# Altium PCB ARDUBOY.PcbDoc
Units mil, origin at the board's own origin, x right, y up, seen from the top; angles counter-clockwise.
Board outline 1980.03 x 1980.03 mil, 2 copper layers (Top Layer, Bottom Layer); 21 components, 26 nets, 143 pads, 47 vias.
Unrouted connection lines stored in the file: 18.
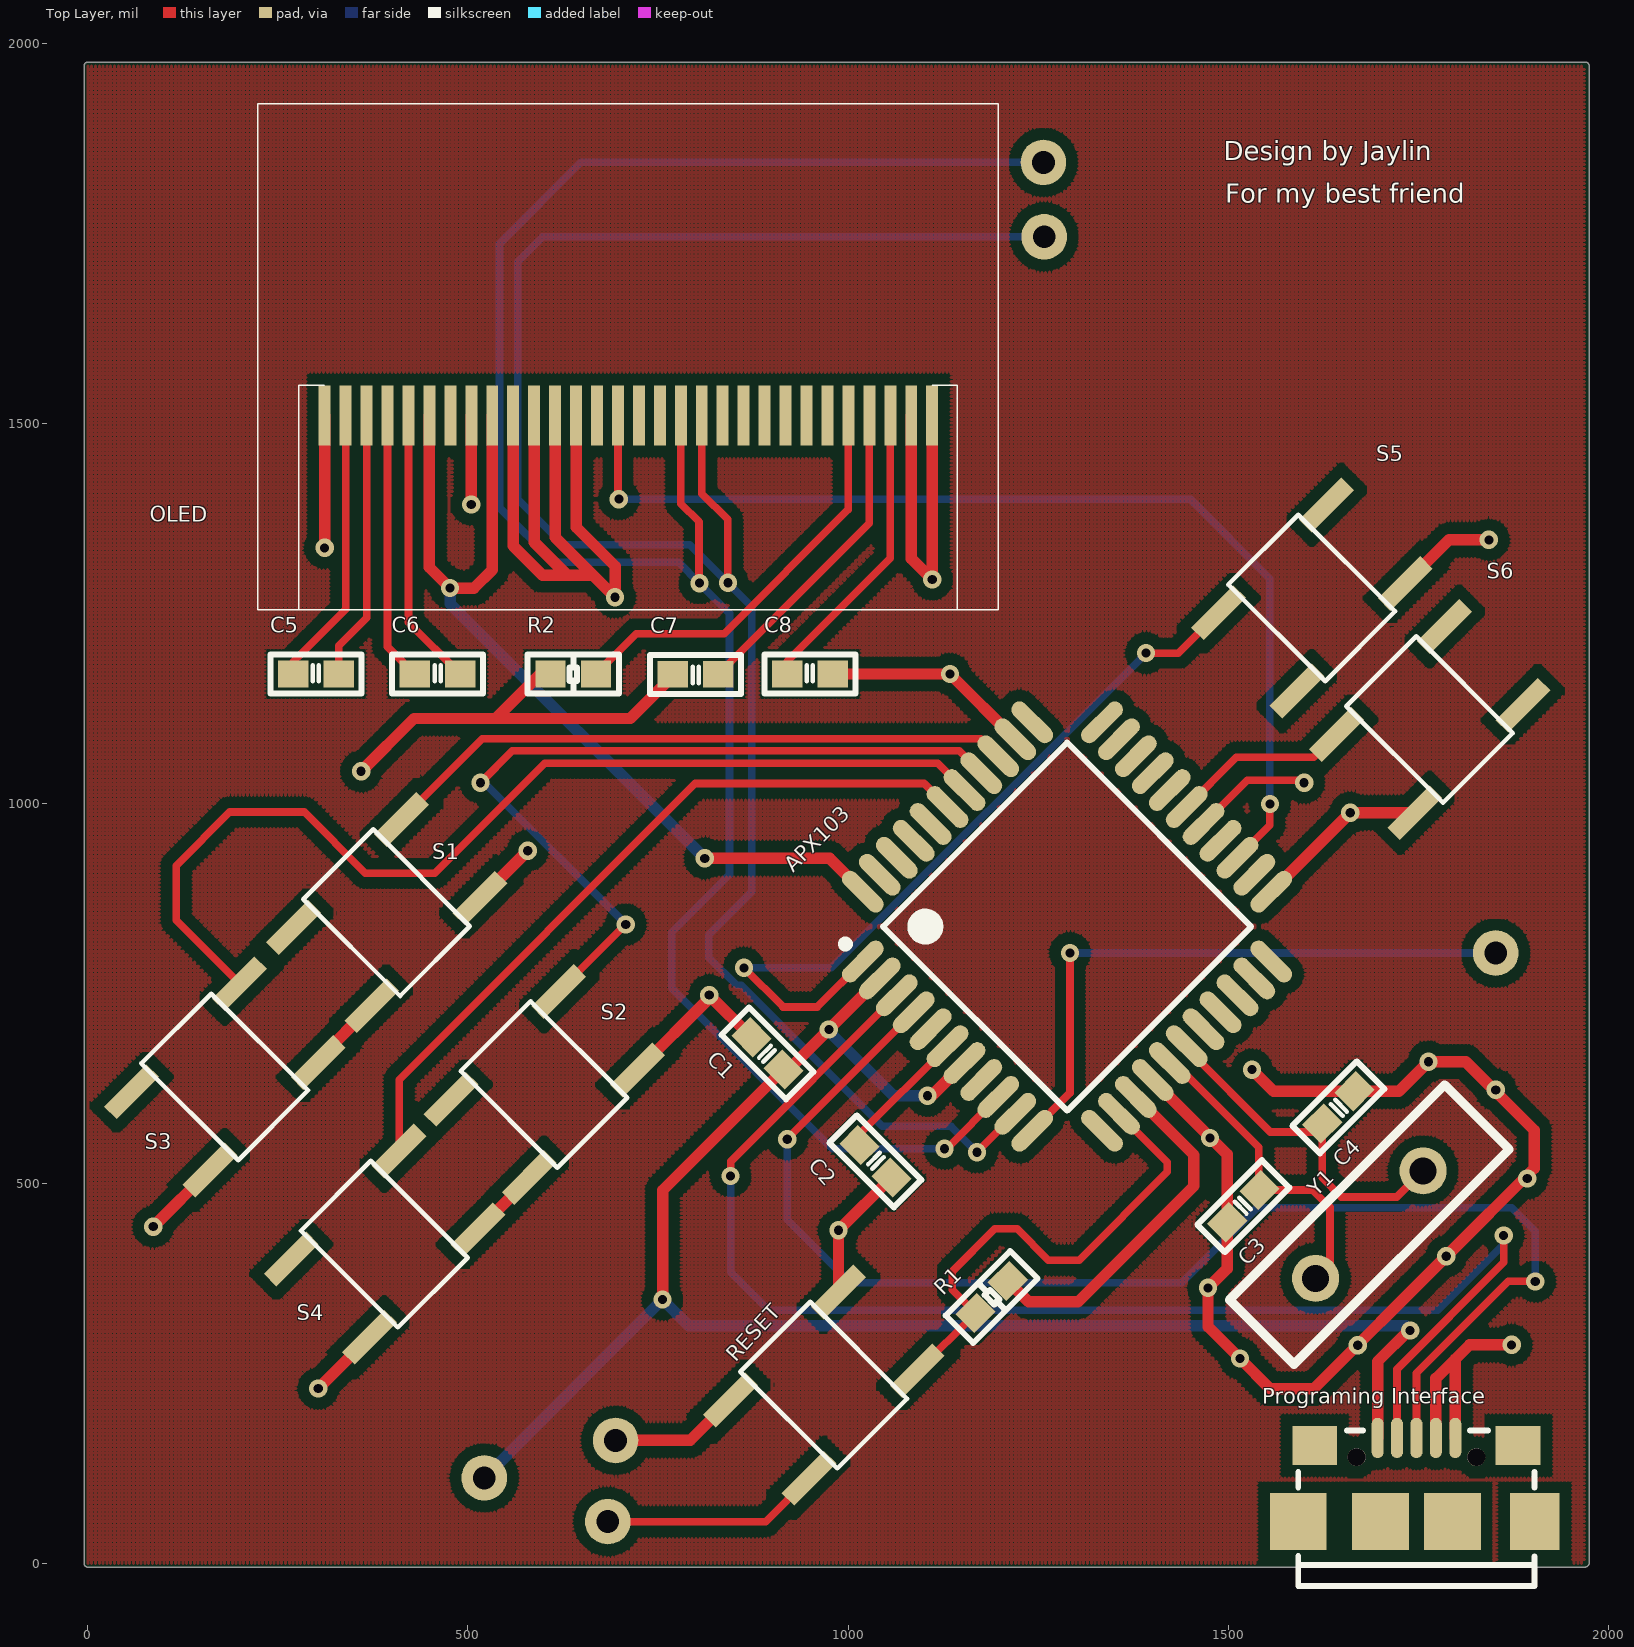
[diagram p0: Top Layer view]
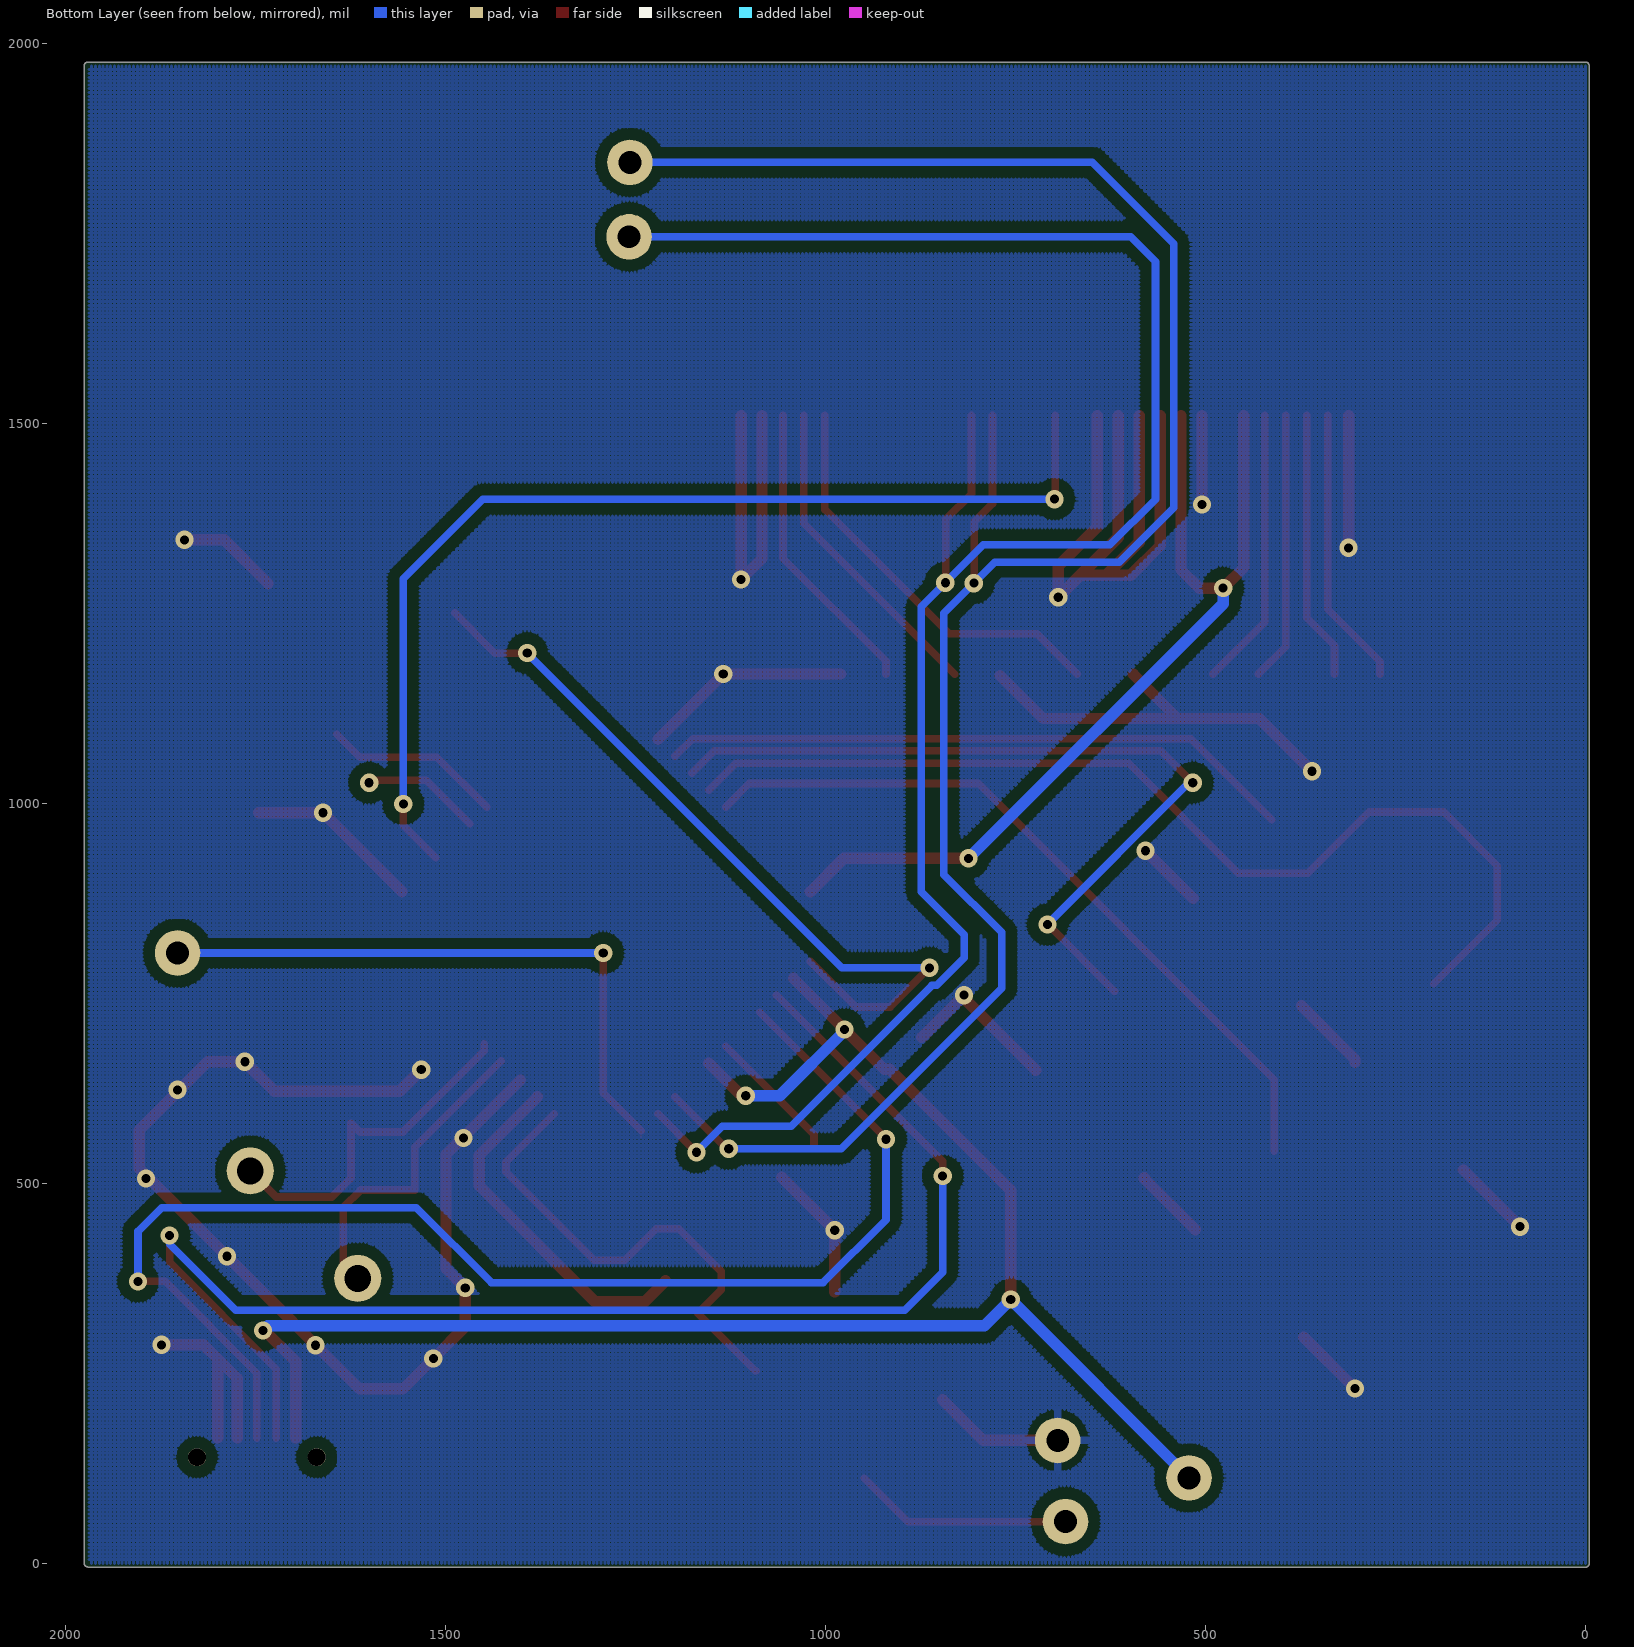
[diagram p1: Bottom Layer view, seen from below]

## Layer stack, top to bottom
Top Solder: solder mask 0.4, Solder Resist, Dk 3.5
Top Layer: signal copper 1.4
Dielectric 1: dielectric 12.6, FR-4, Dk 4.8
Bottom Layer: signal copper 1.4
Bottom Solder: solder mask 0.4, Solder Resist, Dk 3.5

## Board outline
-5.01,0.2 cw(c0,0.39) -5.02,0.39 -5.02,1968.9 cw(c0,1968.9) -4.98,1969.45 cw(c0,1970) 0,1975.01 1968.5,1975.01 cw(c1968.5,1970) 1969.25,1974.96 cw(c1970,1970) 1975.01,1970 1975.01,0.39 cw(c1970,0.39) 1970.51,-4.59 cw(c1968.5,0) 1968.5,-5.02 0,-5.02 cw(c0,0)

## Design rules (kind name [scope] priority, off if disabled: settings)
Clearance poly [InPolygon] p1: gap=15 ignorepadtopadclearanceinfootprint=FALSE
Clearance [All] p2: gap=6 ignorepadtopadclearanceinfootprint=FALSE
PolygonConnect Via [IsVia] p1: connectstyle=Direct reliefconductorwidth=10 reliefentries=4 polygonreliefangle="90 Angle" airgapwidth=10
PolygonConnect [All] p2: connectstyle=Relief reliefconductorwidth=10 reliefentries=4 polygonreliefangle="90 Angle" airgapwidth=10
RoutingVias [All] p1: holewidth=28 width=50 viastyle="Through Hole" minholewidth=28 minwidth=50 maxholewidth=28 maxwidth=50
SolderMaskExpansion [All] p1: expansion=2.5
Width power [InNetClass('power')] p1: maxlimit=60 minlimit=15 preferedwidth=15
Width [InNetClass('power')] p2: maxlimit=10 minlimit=10 preferedwidth=10
30 further rules are at their usual default settings.

## Classes and differential pairs
net class power: GND UVCC VCC

## Components (designator, comment, footprint, x,y, rotation, side; value= is the part's Value field where it differs from the comment)
APX103 "ATmega32U4-AU" 44ML_N 1288.17,837.75 r45 top
C1 "1μF" C0603 894,671 r315 top value=104
C2 "1μF" C0603 1036,529 r135 top value=104
C3 "22pF" C0603 1520,470 r225 top value=104
C4 "22pF" C0603 1645,600 r45 top value=104
C5 "1μF" C0603 300.08,1170 r180 top value=104
C6 "1μF" C0603 460,1170 r180 top value=104
C7 "4.7μF" C0603 799.5,1169.5 r0 top value=104
C8 "2.2μF" C0603 949.92,1170 r180 top value=104
OLED "12864" 12864 711.1,1510 r0 top (schematic designator OLED12864)
"Programing Interface" "USB-mrico" micro_USB 1696.57,165 r180 top
R1 "10K" R0603 1189,350.5 r45 top
R2 "390K" R0603 638.5,1170 r0 top
RESET "RESET" KEY-SMT 968.01,234.51 r45 top (schematic designator SW)
S1 "RESET" KEY-SMT 393,856 r45 top
S2 "move" KEY-SMT 600,630 r45 top
S3 "move" KEY-SMT 180,640 r45 top
S4 "move" KEY-SMT 390,420 r45 top
S5 "AB" KEY-SMT 1610,1270 r45 top
S6 "AB" KEY-SMT 1765,1110 r45 top
Y1 "16MHZ" XTAL1 1756.42,516.42 r225 top

## Footprints (in the part's own frame and the unit in brackets; to place one, negate y for a bottom-side part, rotate by r counter-clockwise, add the part's x,y. Pads: shape width x height; smd on the part's side, far side on the other; paste and mask are expansions set on the pad)
44ML_N [mm] "Thin QFP, 44-Leads, Body 10x10mm, Pitch 0.8mm, IPC Medium Density"
  oval 1.75x0.55 smd: 1(-5.65,4) 2(-5.65,3.2) 3(-5.65,2.4) 4(-5.65,1.6) 5(-5.65,0.8) 6(-5.65,0) 7(-5.65,-0.8) 8(-5.65,-1.6) 9(-5.65,-2.4) 10(-5.65,-3.2) 11(-5.65,-4) 23(5.65,-4) 24(5.65,-3.2) 25(5.65,-2.4) 26(5.65,-1.6) 27(5.65,-0.8) 28(5.65,0) 29(5.65,0.8) 30(5.65,1.6) 31(5.65,2.4) 32(5.65,3.2) 33(5.65,4)
  oval 0.55x1.75 smd: 12(-4,-5.65) 13(-3.2,-5.65) 14(-2.4,-5.65) 15(-1.6,-5.65) 16(-0.8,-5.65) 17(0,-5.65) 18(0.8,-5.65) 19(1.6,-5.65) 20(2.4,-5.65) 21(3.2,-5.65) 22(4,-5.65) 34(4,5.65) 35(3.2,5.65) 36(2.4,5.65) 37(1.6,5.65) 38(0.8,5.65) 39(0,5.65) 40(-0.8,5.65) 41(-1.6,5.65) 42(-2.4,5.65) 43(-3.2,5.65) 44(-4,5.65)
  silkscreen extent -5.77,-4.35 4.35,4.95, body extent -5,-5 5,5, height 1.2
12864 [mm] "OLED12864"
  rect 0.4x2 smd: /CS(-1.75,0) BS0(-3.85,0) BS1(-3.15,0) BS2(-2.45,0) C1N(-7.35,0) C1P(-8.05,0) C2N(-8.75,0) C2P(-9.45,0) D0/SCLK(1.75,0) D1/SDIN(2.45,0) D/C(-0.35,0) IREF(7.35,0) MT(-10.15,0) MT2(10.15,0) NC(-5.95,0) NC(0.35,0) NC(1.05,0) NC(3.15,0) NC(3.85,0) NC(4.55,0) NC(5.25,0) NC(5.95,0) NC(6.65,0) RES(-1.05,0) VBAT(-6.65,0) VCC(8.75,0) VCOMH(8.05,0) VDD(-4.55,0) VLSS(9.45,0) VSS(-5.25,0)
  silkscreen extent -12.38,-6.48 12.36,10.42
C0603 [mil]
  rect 40x35 smd: 1(-29.92,0) 2(29.92,0)
  silkscreen extent -60,-26 60,26
KEY-SMT [mm]
  rect 2x0.6 smd: 1(-2.55,-1.85) 1(2.55,-1.87) 2(-2.55,1.85) 2(2.55,1.85)
  silkscreen extent -1.65,-2.29 1.65,2.29
micro_USB [mm]
  rect 1.651x1.9 smd: 6(-5.25,2.794)
  rect 1.5x1.3 smd: 6(-4.699,0.254) 9(2.099,0.254)
  rect 1.9x1.9 smd: 7(-2.5,2.794) 8(-0.1,2.794) 9(2.65,2.794)
  oval 0.4x1.35 smd: D+(-1.3,0) D-(-0.65,0) G(-2.6,0) ID(-1.95,0) Vbus(0,0)
  round 0.6 hole 0.6: ""(-3.3,0.644) ""(0.7,0.644)
  silkscreen extent -5.25,-0.25 2.65,4.94
R0603 [mil]
  rect 40x35 smd: 1(-29.92,0) 2(29.92,0)
  silkscreen extent -60,-26 60,26
XTAL1 [mil]
  round 62 hole 35.43: 1(0,0) 2(200,0)
  silkscreen extent -100,-60 300,60

## Part data
APX103: "8-bit AVR Microcontroller, 2.7-5.5V, 32KB Flash, 2.5KB EEPROM, 1KB SRAM, USB Controller, 44-pin TQFP, Industrial Grade (-40癈 to 85癈)", Supplier Part Number 1=ATMEGA32U4-AU-ND, ComponentLink1Description="Manufacturer Link", ComponentLink1URL=http://www.atmel.com/products/avr/default.asp?, ComponentLink2Description="ATmega16U4/32U4 Datasheet", ComponentLink2URL=http://www.atmel.com/dyn/resources/prod_documents/doc7766.pdf, ComponentLink3Description="ATmega16U4 ATmega32U4 Summary", ComponentLink3URL=http://www.atmel.com/dyn/resources/prod_documents/7766S.pdf, ComponentLink4Description="Atmel.com Home", ComponentLink4URL=http://www.atmel.com, DatasheetVersion="revD, Jan-2009", PackageDescription="44-Pin Plastic Thin Quad Flat Pack, 10 x 10 x 1.0 mm Body, 0.8 mm Pitch (TQFP)", PackageReference=44ML, PackageVersion="rev.G, Jul-2007", Published=1-Apr-2010, Publisher="Altium Limited", Supplier 1=Digi-Key, Supplier 2=Farnell, Supplier 3=Mouser, Supplier Part Number 2=1748525, Supplier Part Number 3=556-ATMEGA32U4-AU
C1 C2 C3 C4 C5 C6 C7 C8: library part Cap, "Capacitor", LatestRevisionDate=17-Jul-2002, LatestRevisionNote="Re-released for DXP Platform.", Published=8-Jun-2000, Publisher="Altium Limited"
"Programing Interface": library part usb-STM
R1 R2: library part Res2, "Resistor", LatestRevisionDate=17-Jul-2002, LatestRevisionNote="Re-released for DXP Platform.", Published=8-Jun-2000, Publisher="Altium Limited"
RESET S1 S2 S3 S4 S5 S6: library part SW-PB_V, "SWITCH"
Y1: library part XTAL, "Crystal Oscillator", LatestRevisionDate=17-Jul-2002, LatestRevisionNote="Re-released for DXP Platform.", Published=8-Jun-2000, Publisher="Altium Limited"

## Free pads (board coordinates)
  round 60 hole 30: 2(521.5,112.5) 3(694.25,161.75) 4(684,55) 5(1258,1745.12) 6(1257,1843) 7(1852,803)

## Via types
v1: diameter 24, hole 12, Top Layer to Bottom Layer, 47 vias

## Nets (pads, with @x,y where several pads share a name; then routed paths per layer and width w, separated by ;. In a path a pad name is that pad's centre, name@x,y a point inside that pad or via, vN(x,y) a via of type N, cw(c..) or ccw(c..) an arc to the next point about the centre after c; other vN are vias at no path point)
CLK: APX103.9 OLED.D0/SCLK pad.6 | length 2764.9
  Top Layer w10: OLED.D0/SCLK 780,1394 804,1370 v1@804,1290.5 ; v1@1129,544.95 APX103.9
  Bottom Layer w10: v1(1127,545.5) 979,545.5 768,756.5 768,830 844,906 844,1250 v1(804.5,1289.5) 777,1317 613.5,1317 541.5,1389 541.5,1736 648.5,1843 pad.6
D+: "Programing Interface.D+" APX103.4 | length 1771.6
  Top Layer w10: v1(920,558) 920,558.66 APX103.4 ; 1747.76,165 1747.76,250.26 1868.5,371 v1(1904,371)
  Bottom Layer w10: v1(920,558) 920,452 1003,369 1439,369 1538,468 1873,468 1904,437 v1(1904,371)
D-: "Programing Interface.D-" APX103.3 | length 1864.7
  Top Layer w10: v1(845.5,509.5) 845.5,528.71 APX103.3 ; 1722.17,165 1722.17,255.67 1862.5,396 v1(1862.5,431.5)
  Bottom Layer w10: v1(845.5,509.5) 845.5,383 895.5,333 1775.5,333 1862.5,420 v1(1862.5,431.5)
DC: APX103.25 OLED.D/C | length 1397.6
  Top Layer w10: v1@697.32,1397.18 OLED.D/C ; APX103.25 1555,970.95 v1(1555,999)
  Bottom Layer w10: v1(698.5,1400) 1450.5,1400 1555,1295.5 v1(1555,999)
GND: "Programing Interface.G" "Programing Interface.ID" APX103.5 APX103.15 APX103.23 APX103.33 APX103.35 APX103.43 C1.1 C2.1 C3.2 C4.2 C7.1 C8.1 OLED./CS OLED.BS0 OLED.BS1 OLED.BS2 OLED.MT OLED.MT2 OLED.VLSS OLED.VSS pad.3 R2.1 RESET.2 S1.1 S2.1 S3.1 S4.1 S5.1 S6.1 | length 5777
  Top Layer w15: v1(86,443) S3.1@160.51,517.51 ; v1(303,230) S4.1@370.51,297.51 ; S3.1@303.05,658.93 303.05,663.05 S1.1@373.51,733.51 ; v1(311.5,1336) OLED.MT ; v1(359.5,1042) 429,1111.5 536.5,1111.5 ; v1(504.41,1392.91) OLED.VSS ; S4.1@513.05,438.93 580.51,506.39 S2.1@580.51,507.51 ; S1.1@516.05,874.93 v1(578.62,937.5) ; OLED.BS0 559.53,1338.47 598,1300 630.5,1300 ; OLED.BS1 587.09,1343.41 630.5,1300 ; R2.1@595,1170 536.5,1111.5 ; OLED.BS2 614.65,1349.85 664.5,1300 ; OLED./CS 642.2,1363.3 693.5,1312 v1(693.5,1271) 664.5,1300 ; pad.3 792.25,161.75 RESET.2@845.52,215.02 ; S2.1@723.05,648.93 817.5,743.38 v1(817.5,747.5) C1.1 ; C7.1@770.08,1168 713.58,1111.5 536.5,1111.5 ; C8.1 v1(1134.08,1170) APX103.35 ; RESET.2@987.5,357 v1(987.5,438.19) C2.1 ; OLED.VLSS 1083.15,1321.85 v1(1110.71,1294.29) OLED.MT2 ; APX103.15 1498.84,537.99 C3.2 1498.84,387.84 v1(1473.5,362.5) 1473.5,311.5 v1(1515.5,269.5) 1555.5,229.5 1612.5,229.5 v1(1787,404) 1902.5,519.5 1902.5,570 1812.5,660 v1(1763.5,660) 1724.66,621.16 C4.2 1559.84,621.16 v1(1531.5,649.5) ; APX103.23 v1(1660.64,987.51) S6.1@1745.51,987.51 ; S5.1@1733.05,1288.93 1790.62,1346.5 v1(1843,1346.5) ; 1773.35,165 1773.35,243.35 1798.94,268.94 ; 1798.94,165 1798.94,268.94 ; v1(1873,287.5) 1817.5,287.5 1798.94,268.94 ; 630.5,1300 664.5,1300
  other v1: 1670.5,287 1893.5,506.5 1476,559.5 1852,623
MOSI: APX103.10 OLED.D1/SDIN pad.5 | length 2635.5
  Top Layer w10: OLED.D1/SDIN 807.56,1407.44 841.5,1373.5 v1@841.5,1288.5 ; v1(1169.5,540.91) APX103.10
  Bottom Layer w10: v1(1169.5,540.91) 1135.41,575 1045,575 859.5,760.5 853.47,760.5 817,796.97 817,827 873.5,883.5 873.5,1258.5 v1(842,1290) 792,1340 625.5,1340 565.5,1400 565.5,1712.5 598.12,1745.12 pad.5
NetAPX103_1: APX103.1 S5.2 | length 1020.6
  Top Layer w10: v1(863,783.5) 914.5,732 959.71,732 APX103.1 ; v1(1392,1197.5) 1434.5,1197.5 S5.2@1487.51,1250.51
  Bottom Layer w10: v1(863,783.5) 978,783.5 v1(1392,1197.5)
  other v1: 1392,1197.5 1392,1197.5
NetAPX103_6: APX103.6 C2.2 | length 178.4
  Top Layer w10: C2.2 1014.84,564.42 APX103.6
NetAPX103_28: APX103.28 S6.2 | length 236.6
  Top Layer w10: APX103.28 1511,1060.58 1612.58,1060.58 S6.2@1642.51,1090.51
NetAPX103_36: APX103.36 S1.2 | length 838.9
  Top Layer w10: S1.2@412.49,978.49 519,1085 1174.54,1085 APX103.36
NetAPX103_37: APX103.37 S2.2 | length 1081.6
  Top Layer w10: v1(516.5,1027) 558.5,1069 1146,1069 APX103.37 ; S2.2@619.49,752.49 v1(707.5,840.5)
  Bottom Layer w10: v1(516.5,1027) 521.64,1027 707.5,841.14 v1(707.5,840.5)
NetAPX103_38: APX103.38 S3.2 | length 1364.2
  Top Layer w10: S3.2@199.49,762.49 116,845.98 116,918 186.5,988.5 284.5,988.5 365,908 456.5,908 601,1052.5 1117.96,1052.5 APX103.38
NetAPX103_39: APX103.39 S4.2 | length 989.6
  Top Layer w10: S4.2@409.49,542.49 409.49,636.49 799,1026 1099.92,1026 APX103.39
NetC5_1: C5.1 OLED.C2N | length 355.2
  Top Layer w10: C5.1 330,1207.21 366.61,1243.83 OLED.C2N
NetC5_2: C5.2 OLED.C2P | length 368.5
  Top Layer w10: C5.2 270.16,1186.16 339.05,1255.05 OLED.C2P
NetC6_1: C6.1 OLED.C1N | length 368.2
  Top Layer w10: OLED.C1N 421.73,1238.19 C6.1
NetC6_2: C6.2 OLED.C1P | length 354.9
  Top Layer w10: OLED.C1P 394.17,1205.91 C6.2
NetC7_2: C7.2 OLED.VCOMH | length 422.8
  Top Layer w10: C7.2 1028.03,1368.11 OLED.VCOMH
NetC8_2: C8.2 OLED.VCC | length 396.2
  Top Layer w10: C8.2 920,1187 1055.59,1322.59 OLED.VCC
NetOLED12864_IREF: OLED.IREF R2.2 | length 545.2
  Top Layer w10: R2.2 721.42,1223 837,1223 1000.47,1386.47 OLED.IREF
OLEDRST: APX103.27 | length 160.7
  Top Layer w10: APX103.27 1524.96,1030 1600.5,1030 v1@1603.5,1027
  other v1: 1600,1027
Reset: APX103.13 pad.4 R1.1 RESET.1 | length 937.8
  Top Layer w10: pad.4 891.51,55 RESET.1@948.52,112.02 ; RESET.1@1091.06,253.44 1091.94,253.44 R1.1 1137,360.19 1137,384 1193,440 1222.5,440 1263.5,399 1304,399 1420,515 1420,527.75 APX103.13
UVCC: "Programing Interface.Vbus" APX103.2 APX103.7 C1.2 pad.2 | length 2275
  Top Layer w15: v1(756,347) 756,490.69 C1.2 922.09,649.84 APX103.2 ; v1(1104.5,615.21) 1110.17,615.21 APX103.7 ; 1696.57,165 1696.57,265.57 v1@1739.5,308.5
  Bottom Layer w15: pad.2 v1(756,347) 790.5,312.5 1733.5,312.5 v1(1739.5,306.5) ; v1(974.75,702.5) 972.5,702.5 1059.79,615.21 v1(1104.5,615.21)
VCC: APX103.14 APX103.24 APX103.34 APX103.42 APX103.44 OLED.VBAT OLED.VDD R1.2 | length 1695.4
  Top Layer w15: OLED.VBAT 449.29,1310.21 v1(476.5,1283) 508,1283 531.97,1306.97 OLED.VDD ; v1(811.5,927.5) 975.7,927.5 APX103.44 ; R1.2 1237.81,344 1302.5,344 1455,496.5 1455,537.29 APX103.14
  Bottom Layer w15: v1(476.5,1283) 476.5,1262.5 v1(811.5,927.5)
XTAL1: APX103.17 C4.1 Y1.1 | length 462.4
  Top Layer w10: APX103.17@1448.71,683.71 1448.71,674.29 1555.5,567.5 1612.5,567.5 C4.1 1623.84,507.16 1649,482 1722,482 Y1.1
XTAL2: APX103.16 C3.1 Y1.2 | length 421.9
  Top Layer w10: APX103.16@1426.44,661.44 1540.22,547.66 1540.22,491.16 C3.1 1611.34,491.16 1634,468.5 1634,394 Y1.2
pads on no net: "Programing Interface.6" "Programing Interface.7" "Programing Interface.8" "Programing Interface.9" "Programing Interface." APX103.8 APX103.11 APX103.12 APX103.18 APX103.19 APX103.20 APX103.21 APX103.22 APX103.26 APX103.29 APX103.30 APX103.31 APX103.32 APX103.40 APX103.41 OLED.NC OLED.RES
copper on no net: | length 823.4
  Top Layer w0: 1242.23,560.23 1242.23,569.1
  Top Layer w10: 1242.23,569.1 1292,618.87 v1(1292,803)
  Bottom Layer w10: v1(1292,803) 1852,803

## Polygon pours and split planes (outlines as drawn)
GND on Bottom Layer "Bottom Layer-No Net" (hatched 90Degree grid 5 track 4, remove dead copper, pour order 0): 0,1970 1968.5,1970 1968.5,0 0,0
no net on Top Layer (hatched 90Degree grid 5 track 4, remove dead copper, pour order 4): 0,0 1969.61,0 1970,0.39 1968.5,1.89 1968.5,1970 0,1970

## Silkscreen, mask and mechanical layers (free items; w line width, h text height)
Top Overlay:
  text "Design by Jaylin" at 1494.5,1846 h25
  text "For my best friend" at 1496.5,1790 h25
Bottom Solder:
  lines w10: 0,0 1968.5,0 ; 0,0.39 0,1968.9 ; 0,1970 1968.5,1970 ; 1970,0.39 1970,1970